# Altium PCB msp430f.PcbDoc (part 1 of 2)
Units mil, origin at the board's own origin, x right, y up, seen from the top; angles counter-clockwise.
Board outline 1930 x 4050 mil, 2 copper layers (Top Layer, Bottom Layer); 52 components, 80 nets, 292 pads, 95 vias.
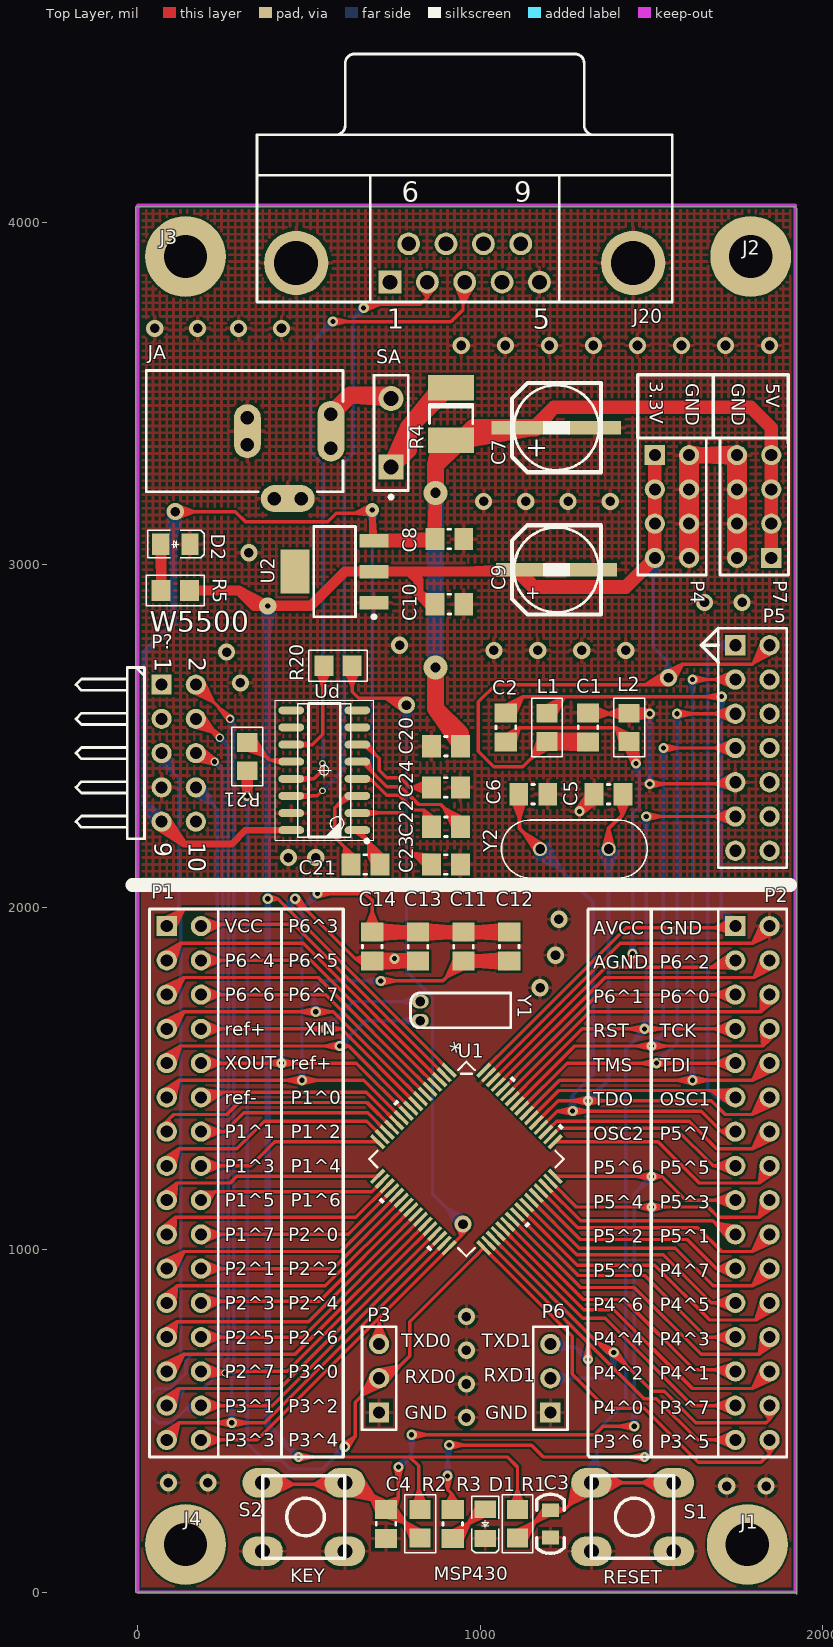
[diagram p0: Top Layer view]
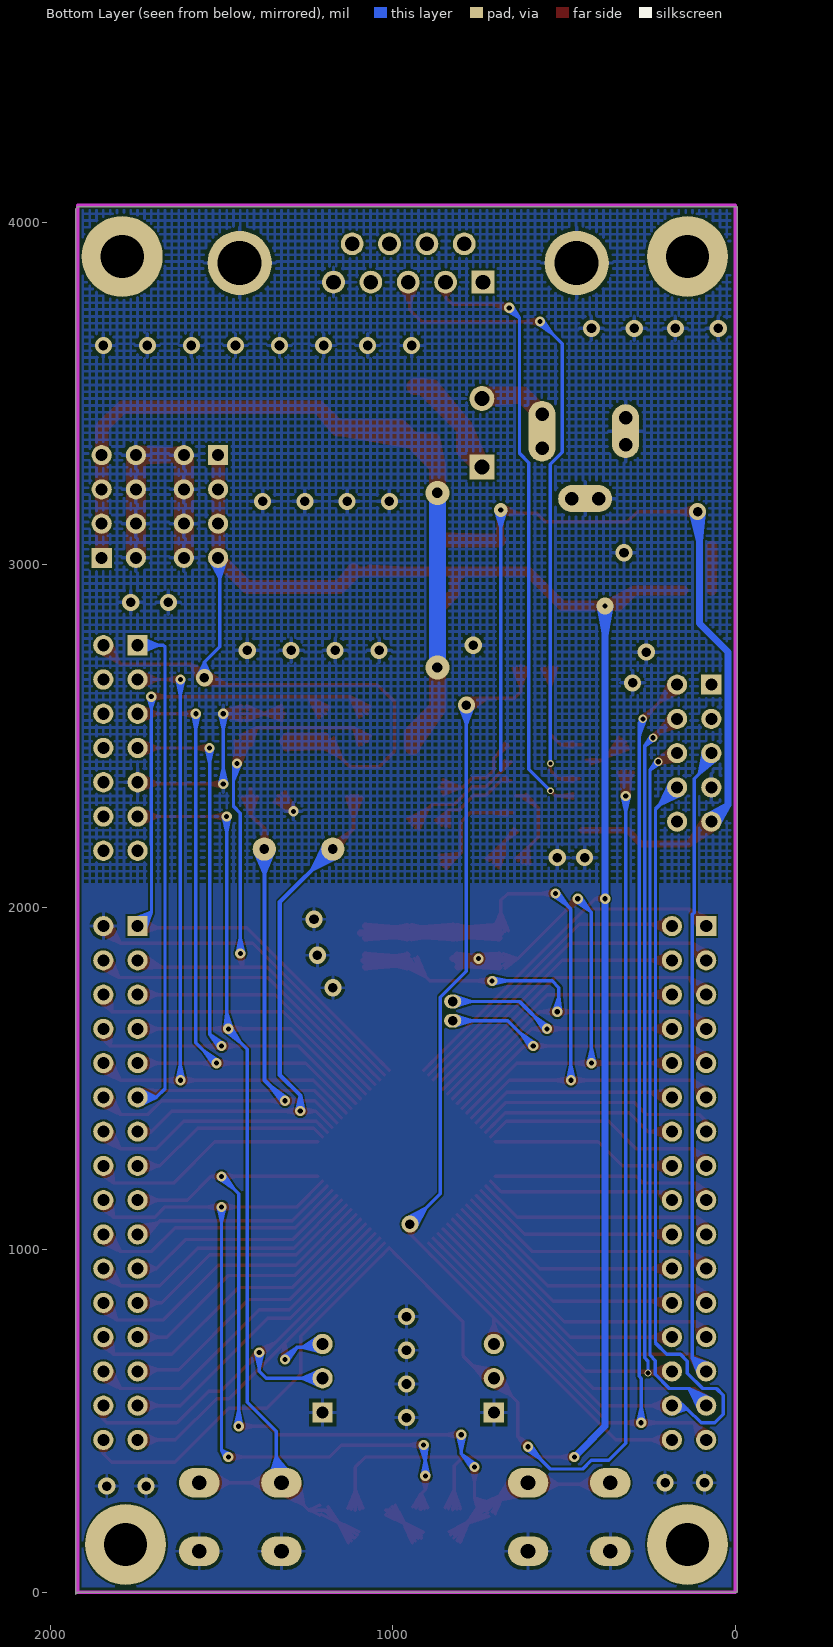
[diagram p1: Bottom Layer view, seen from below]

## Layer stack, top to bottom
Top Layer: signal copper 1.4
Dielectric: dielectric 12.6, FR-4, Dk 4.8
Bottom Layer: signal copper 1.4

## Board outline
-5,4045 -5,0 1920,0 1925,-5 1925,3215 1925,4040 1920,4045 -5,4045

## Design rules (kind name [scope] priority, off if disabled: settings)
Clearance [All] p1: gap=6
FabricationTestPointUsage TestPointUsage [All] p1: valid=0 allowmultiple=FALSE
FabricationTestpoint Testpoint [All] p1: side=3 testpointundercomponent=TRUE minsize=40 maxsize=100 preferedsize=60 minholesize=0 maxholesize=40 preferedholesize=32 testpointgrid=1 allowsidetop=TRUE allowsidebottom=TRUE usegrid=TRUE gridtolerance=0.01
HoleSize [All] p1: absolutevalues=TRUE maxlimit=1000 minlimit=1 maxpercent=80.000 minpercent=20.000
PolygonConnect [All] p1: connectstyle=Relief reliefconductorwidth=10 reliefentries=4 polygonreliefangle="90 Angle" airgapwidth=10
RoutingVias [All] p1: holewidth=28 width=50 viastyle="Through Hole" minholewidth=2 minwidth=5 maxholewidth=280 maxwidth=500
SolderMaskExpansion [All] p1: expansion=4
Width [All] p1: maxlimit=100 minlimit=10 preferedwidth=10
25 further rules are at their usual default settings.

## Components (designator, comment, footprint, x,y, rotation, side; value= is the part's Value field where it differs from the comment)
C1 "" CAP_SMD_0805_2012_M 1315,2525 r90 top
C2 "" CAP_SMD_0805_2012_M 1075,2525 r270 top
C3 "" c0805 1205,200 r90 top
C4 "" CAP_SMD_0805_2012_M 725,200 r90 top
C5 "22P" CAP_SMD_0805_2012_M 1375,2330 r0 top
C6 "22P" CAP_SMD_0805_2012_M 1155,2330 r180 top
C7 "CAP" AEC_SMD_6.3*5.3_6.3*7.7_M 1115,3400 r0 top
C8 "" CAP_SMD_0805_2012_M 910,3075 r180 top
C9 "CAP" EC6.3X6.3 1115,2985 r0 top
C10 "" CAP_SMD_0805_2012_M 910,2885 r180 top
C11 "" CAP_SMD_0805_2012_M 951.67,1885 r270 top
C12 "" CAP_SMD_0805_2012_M 1085,1885 r270 top
C13 "" CAP_SMD_0805_2012_M 818.33,1885 r270 top
C14 "" CAP_SMD_0805_2012_M 685,1885 r270 top
C20 "0.1uF" CAP_SMD_0805_2012_M 900,2470 r0 top
C21 "0.1uF" CAP_SMD_0805_2012_M 665,2125 r180 top
C22 "0.1uF" CAP_SMD_0805_2012_M 900,2235 r0 top
C23 "0.1uF" CAP_SMD_0805_2012_M 900,2125 r180 top
C24 "0.1uF" CAP_SMD_0805_2012_M 900,2350 r180 top
D1 "LED0" LED_SMD_0805_2012_M 1015,200 r90 top
D2 "LED0" LED_SMD_0805_2012_M 110,3060 r180 top
J1 "Socket" Screw_3x6 1780,140 r0 top
J2 "Socket" Screw_3x6 1790,3900 r0 top
J3 "Socket" Screw_3x6 140,3900 r0 top
J4 "Socket" Screw_3x6 140,140 r0 top
J20 "DB9_Female" DSUB1.385-2H9 955,4255 r0 top
JA "PWR2.5" KLD-0202 25,3390 r0 top
L1 "Inductor" RES_SMD_0805_2012_M 1195,2525 r270 top
L2 "Inductor" RES_SMD_0805_2012_M 1435,2525 r90 top
P1 "Header 16X2" HDR2X16 85,1945 r270 top
P2 "Header 16X2" HDR2X16 1745,1945 r270 top
P3 "Header 3" HDR1X3 705,525 r90 top
P4 "Header 4X2" HDR2X4 1510,3320 r270 top
P5 "Header 7X2" HDR2X7 1745,2765 r270 top
P6 "Header 3" HDR1X3 1205,525 r90 top
P7 "Header 4X2" HDR2X4 1850,3020 r90 top
P? "Header 5X2H" HDR2X5H 70,2650 r270 top
R1 "Res2" RES_SMD_0805_2012_M 1109,200 r90 top
R2 "Res2" RES_SMD_0805_2012_M 825,200 r90 top
R3 "Res2" CAP_SMD_0805_2012_M 920,200 r270 top
R4 "500mA FUSE" 1812 915,3440 r270 top
R5 "Res2" RES_SMD_0805_2012_M 110,2925 r0 top
R20 "100R" RES_SMD_0805_2012_M 585,2705 r0 top
R21 "100R" RES_SMD_0805_2012_M 320,2440 r270 top
S1 "SW-PB" SW01 1265,360 r0 top
S2 "SW-PB" SW01 305,360 r0 top
SA "SW-PB" SPST-2 740,3385 r90 top
U1 "MSP430F14 7/8/9" TQFP-64 960,1265 r315 top
U2 "AMS1117" SOT230P700X180-4N 575,2980 r180 top
Ud "SP3232" SOIC-16N 545,2400 r180 top
Y1 "" XTAL32 825,1725 r0 top
Y2 "12M" XTAL_DIP_HC49US2_N 1375,2170 r180 top

## Footprints (in the part's own frame and the unit in brackets; to place one, negate y for a bottom-side part, rotate by r counter-clockwise, add the part's x,y. Pads: shape width x height; smd on the part's side, far side on the other; paste and mask are expansions set on the pad)
1812 [mm] "Chip Capacitor; Body 4.5 x 3.2 mm (LxW typ)"
  rect 1.9x3.4 smd: 1(-1.95,0) 2(1.95,0)
  silkscreen extent -0.7,-1.6 0.7,1.6
AEC_SMD_6.3*5.3_6.3*7.7_M [mm]
  rect 3.9x1 smd: 1(-0.127,0) 2(5.588,0)
  silkscreen extent -0.56,-3.31 6.04,3.31
c0805 [mil]
  rect 40x50 smd: 1(-40,0) 2(40,0)
  silkscreen extent -86,-40 86,40
CAP_SMD_0805_2012_M [mm] "Chip Capacitor, 2-Leads, Body 2.15x1.35mm, IPC Low Density"
  rect 1.4x1.65 smd: 1(-1.075,0) 2(1.075,0)
  silkscreen extent -0.1,-0.72 0.1,0.72, body extent -1.15,-0.75 1.15,0.75, height 0.9
DSUB1.385-2H9 [mm] "Connector; D Subminiature; 9 Position; Right Angle; Pitch 1.385 mm"
  rect 1.69x1.69 hole 1.09: 1(-5.54,-10.92)
  round 1.69 hole 1.09: 2(-2.77,-10.92) 3(0,-10.92) 4(2.77,-10.92) 5(5.54,-10.92) 6(-4.155,-8.08) 7(-1.385,-8.08) 8(1.385,-8.08) 9(4.155,-8.08)
  round 4.76 hole 3.26: 10(-12.495,-9.5) 11(12.495,-9.5)
  silkscreen extent -15.4,-12.4 15.4,6
EC6.3X6.3 [mm]
  rect 3.5x1 smd: 1(0,0) 2(5.475,0)
  silkscreen extent -0.56,-3.31 6.04,3.31
HDR1X3 [mm] "Connector; Header; 3 Position"
  rect 1.5x1.5 hole 0.9: 1(0,0)
  round 1.5 hole 0.9: 2(2.54,0) 3(5.08,0)
  silkscreen extent -1.27,-1.27 6.35,1.27
HDR2X4 [mm] "Connector; Header; 4x2 Position"
  rect 1.5x1.5 hole 0.9: 1(0,0)
  round 1.5 hole 0.9: 2(0,2.54) 3(2.54,0) 4(2.54,2.54) 5(5.08,0) 6(5.08,2.54) 7(7.62,0) 8(7.62,2.54)
  silkscreen extent -1.27,-1.27 8.89,3.81
HDR2X5H [mm] "Connector; Header; 5x2 Position; Right Angle"
  rect 1.5x1.5 hole 0.9: 1(0,0)
  round 1.5 hole 0.9: 2(0,2.54) 3(2.54,0) 4(2.54,2.54) 5(5.08,0) 6(5.08,2.54) 7(7.62,0) 8(7.62,2.54) 9(10.16,0) 10(10.16,2.54)
  silkscreen extent -1.27,-6.35 11.43,-1.27
HDR2X7 [mm] "Connector; Header; 7x2 Position"
  rect 1.5x1.5 hole 0.9: 1(0,0)
  round 1.5 hole 0.9: 2(0,2.54) 3(2.54,0) 4(2.54,2.54) 5(5.08,0) 6(5.08,2.54) 7(7.62,0) 8(7.62,2.54) 9(10.16,0) 10(10.16,2.54) 11(12.7,0) 12(12.7,2.54) 13(15.24,0) 14(15.24,2.54)
  silkscreen extent -1.27,-1.27 16.51,3.81
HDR2X16 [mm] "Connector; Header; 16x2 Position"
  rect 1.5x1.5 hole 0.9: 1(0,0)
  round 1.5 hole 0.9: 2(0,2.54) 3(2.54,0) 4(2.54,2.54) 5(5.08,0) 6(5.08,2.54) 7(7.62,0) 8(7.62,2.54) 9(10.16,0) 10(10.16,2.54) 11(12.7,0) 12(12.7,2.54) 13(15.24,0) 14(15.24,2.54) 15(17.78,0) 16(17.78,2.54) 17(20.32,0) 18(20.32,2.54) 19(22.86,0) 20(22.86,2.54) 21(25.4,0) 22(25.4,2.54) 23(27.94,0) 24(27.94,2.54) 25(30.48,0) 26(30.48,2.54) 27(33.02,0) 28(33.02,2.54) 29(35.56,0) 30(35.56,2.54) 31(38.1,0) 32(38.1,2.54)
  silkscreen extent -1.27,-1.27 39.37,3.81
KLD-0202 [mm] "DC Power Jack, 2.5mm, KLD Series, PCB Mount"
  oval 2x4.5 all layers, no hole: 1(13.7,0)
  round 1.5 hole 1: 1A(13.7,-1.25) 1B(13.7,1.25) 2A(7.5,-1) 2B(7.5,1) 3A(9.5,-5) 3B(11.5,-5)
  oval 2x4 all layers, no hole: 2(7.5,0)
  oval 4x2 all layers, no hole: 3(10.5,-5)
  silkscreen extent 0,-4.5 14.6,4.5
LED_SMD_0805_2012_M [mm] "LED 2-Leads, Body 2.00x1.35mm, IPC Low Density"
  rect 1.28x1.57 smd: 1(1.085,0) 2(-1.085,0)
  silkscreen extent -2.16,-1.02 2.03,1.02, body extent -1.1,-0.72 1.1,0.72, height 0.8
RES_SMD_0805_2012_M [mm] "Chip Resistor, 2-Leads, Body 2.10x1.37mm, IPC Low Density"
  rect 1.4x1.55 smd: 1(-1.05,0) 2(1.05,0)
  silkscreen extent -2.16,-1.14 2.16,1.14, body extent -1.1,-0.73 1.1,0.73, height 0.8
Screw_3x6 [mm]
  round 6 hole 3.2: 1(0,0)
SOIC-16N [mm]
  oval 1.9x0.6 smd: 1(-2.45,4.445) 2(-2.45,3.175) 3(-2.45,1.905) 4(-2.45,0.635) 5(-2.45,-0.635) 6(-2.45,-1.905) 7(-2.45,-3.175) 8(-2.45,-4.445) 9(2.45,-4.445) 10(2.45,-3.175) 11(2.45,-1.905) 12(2.45,-0.635) 13(2.45,0.635) 14(2.45,1.905) 15(2.45,3.175) 16(2.45,4.445)
  silkscreen extent -3.65,-5.2 3.65,5.37
SOT230P700X180-4N [mm] "SOT223, 4-Leads, Body 6.50x7.00mm (avg), Pitch 2.30mm, IPC Medium Density"
  rect 2.15x1 smd: 1(-2.925,2.3) 2(-2.925,0) 3(-2.925,-2.3)
  rect 2.15x3.25 smd: 4(2.925,0)
  silkscreen extent -3.05,-3.35 1.55,3.47, body extent -1.85,-3.35 1.85,3.35, height 1.8
SPST-2 [mm] "Switch; 2 Leads"
  rect 1.85x1.85 hole 1.1: 1(-2.54,0)
  round 1.85 hole 1.1: 2(2.54,0)
  silkscreen extent -4.89,-1.27 4.28,1.27
SW01 [mm]
  oval 2.999x2.2 hole 1.1: 1(1.524,-1.016) 1(7.62,-1.016) 2(1.524,-6.096) 2(7.62,-6.096)
  silkscreen extent 1.52,-6.6 7.62,-0.51
TQFP-64 [mil]
  rect 53.5x11 smd: 1(-219.25,147.64) 2(-219.25,127.95) 3(-219.25,108.27) 4(-219.25,88.58) 5(-219.25,68.9) 6(-219.25,49.21) 7(-219.25,29.53) 8(-219.25,9.84) 9(-219.25,-9.84) 10(-219.25,-29.53) 11(-219.25,-49.21) 12(-219.25,-68.9) 13(-219.25,-88.58) 14(-219.25,-108.27) 15(-219.25,-127.95) 16(-219.25,-147.64) 33(219.25,-147.64) 34(219.25,-127.95) 35(219.25,-108.27) 36(219.25,-88.58) 37(219.25,-68.9) 38(219.25,-49.21) 39(219.25,-29.53) 40(219.25,-9.84) 41(219.25,9.84) 42(219.25,29.53) 43(219.25,49.21) 44(219.25,68.9) 45(219.25,88.58) 46(219.25,108.27) 47(219.25,127.95) 48(219.25,147.64)
  rect 11x53.5 smd: 17(-147.64,-219.25) 18(-127.95,-219.25) 19(-108.27,-219.25) 20(-88.58,-219.25) 21(-68.9,-219.25) 22(-49.21,-219.25) 23(-29.53,-219.25) 24(-9.84,-219.25) 25(9.84,-219.25) 26(29.53,-219.25) 27(49.21,-219.25) 28(68.9,-219.25) 29(88.58,-219.25) 30(108.27,-219.25) 31(127.95,-219.25) 32(147.64,-219.25) 49(147.64,219.25) 50(127.95,219.25) 51(108.27,219.25) 52(88.58,219.25) 53(68.9,219.25) 54(49.21,219.25) 55(29.53,219.25) 56(9.84,219.25) 57(-9.84,219.25) 58(-29.53,219.25) 59(-49.21,219.25) 60(-68.9,219.25) 61(-88.58,219.25) 62(-108.27,219.25) 63(-127.95,219.25) 64(-147.64,219.25)
  silkscreen extent -266,-266 266,266, body extent 0,0 10,10, height 10
XTAL32 [mil]
  oval 50x40 hole 28: 1(0,0) 2(0,-56)
  silkscreen extent -28,-77 264,25
XTAL_DIP_HC49US2_N [mil]
  round 42 / inner round 68 / far side round 68 hole 28: 1(0,0) 2(200,0)
  silkscreen extent -113,-85 313,85

## Part data
C1 C2 C3 C4 C8 C10 C11 C12 C13 C14: library part Cap, "Capacitor"
C5 C6: library part CAP
C20 C21 C22 C23 C24: library part C, "C Capacity"
D1 D2: "Typical INFRARED GaAs LED"
J20: library part DB9, "J Receptacle Assembly, 9 Position, Right Angle"
JA: "Low Voltage Power Supply Connector"
P1 P2: "Header, 16-Pin, Dual row"
P3 P6: "Header, 3-Pin"
P4 P7: "Header, 4-Pin, Dual row"
P5: "Header, 7-Pin, Dual row"
P?: "Header, 5-Pin, Dual row, Right Angle"
R1 R2 R3 R5: "Resistor"
R4: library part Res2, "Resistor"
R20 R21: library part R, "R Resistor"
S1 S2 SA: "Switch"
Ud: library part MAX3232, "U +3.3V Powered RS-232 Driver/Receiver"
Y1: library part XTAL, "Crystal Oscillator"
Y2: library part CRYSTAL

## Via types
v1: diameter 50, hole 28, Top Layer to Bottom Layer, 43 vias
v2: diameter 30, hole 15, Top Layer to Bottom Layer, 42 vias
v3: diameter 25, hole 15, Top Layer to Bottom Layer, 3 vias
v4: diameter 70, hole 30, Top Layer to Bottom Layer, 2 vias
v5: diameter 20, hole 12, Top Layer to Bottom Layer, 2 vias
v6: diameter 40, hole 15, Top Layer to Bottom Layer, 1 vias
v7: diameter 20, hole 15, Top Layer to Bottom Layer, 1 vias
v8: diameter 50, hole 15, Top Layer to Bottom Layer, 1 vias

## Nets (pads, with @x,y where several pads share a name; then routed paths per layer and width w, separated by ;. In a path a pad name is that pad's centre, name@x,y a point inside that pad or via, vN(x,y) a via of type N, cw(c..) or ccw(c..) an arc to the next point about the centre after c; other vN are vias at no path point)
AGND: C2.2 L2.1 P2.3 U1.62 | length 4341
  Top Layer w10: U1.62@1038.64,1496.76 1366.89,1825 1725,1825 P2.3@1745,1845 1674.25,1825 ; U1.62@1053.5,1511.62 1078.6,1536.72 ; C2.2@1065.91,2500.36 1114.37,2524.37 ; C2.2@1071.23,2491.75 1114.37,2524.37 ; C2.2@1075,2485 1114.37,2524.37 ; C2.2@1079.92,2482.68 1114.37,2524.37 ; C2.2@1090.47,2475.86 1114.37,2524.37 ; C2.2@1099.93,2472.25 1114.37,2524.37 ; L2.1@1412.3,2472.76 1396.69,2524.37 ; L2.1@1417.52,2474.1 v2@1455,2420.58 ; L2.1@1421.67,2476.59 1396.69,2524.37 ; L2.1@1426.2,2479.23 v2@1455,2420.58 ; L2.1@1432.05,2483.66 1396.69,2524.37 ; L2.1@1434.8,2486.26 1396.69,2524.37 ; v2@1435,1865 1440,1825 ; L2.1@1435,2485 L2.1@1455,2465 ; L2.1@1437.95,2483.66 v2@1455,2420.58 ; L2.1@1440.51,2492.94 1396.69,2524.37 ; v2@1445.01,2420.41 L2.1@1451.83,2464.93 ; v2@1445.06,2421.11 L2.1@1455,2465 ; v2@1445.11,2418.5 L2.1@1443.27,2463.99 ; v2@1445.19,2421.92 L2.1@1458.69,2464.9 ; v2@1445.58,2416.63 L2.1@1434.66,2462.01 ; L2.1@1445.61,2501.69 1396.69,2524.37 ; v2@1446.23,2415.2 L2.1@1427.6,2459.71 ; L2.1@1450.34,2485.76 v2@1455,2420.58 ; v2@1454.69,1862.54 1440,1825 ; L2.1@1460.42,2485.7 v2@1455,2420.58 ; v2@1462.6,2426.5 L2.1@1427.6,2459.71 ; v2@1463.48,2425.3 L2.1@1434.66,2462.01 ; v2@1464.32,2423.62 L2.1@1443.27,2463.99 ; v2@1464.84,2421.81 L2.1@1451.83,2464.93 ; v2@1464.94,2421.11 L2.1@1455,2465 ; v2@1465,2420.29 L2.1@1458.69,2464.9 ; P2.3@1734.48,1867.16 1674.25,1825 ; P2.3@1739.69,1858.52 1674.25,1825 ; P2.3@1747.55,1830.7 1674.25,1825 ; P2.3@1747.64,1820.62 1674.25,1825 ; 1114.37,2524.37 1396.69,2524.37 ; L2.1@1427.6,2459.71 v2(1455,2420) ; L2.1@1434.66,2462.01 v2(1455,2420) ; 1440,1825 v2(1445,1865) 1440,1860 1440,1825 ; L2.1@1443.27,2463.99 v2(1455,2420) ; L2.1@1451.83,2464.93 v2(1455,2420) ; v2(1455,2420) L2.1@1458.69,2464.9 ; v2(1455,2420) L2.1@1455,2465
  Bottom Layer w10: v2@1435.06,1866.11 1445,1910 v2@1454.94,1866.11 ; v2(1445,1865) 1445,2275 1465,2295 1465,2410 v2(1455,2420) 1465,2369.88 ; v2@1445.43,2417.09 1465,2369.88 ; v2@1464.95,2420.99 1465,2369.88
AVCC: C2.1 L1.1 P2.1 U1.64 | length 3757
  Top Layer w10: U1.64@1010.81,1524.6 1426.21,1940 P2.1@1755,1940 ; U1.64@1025.66,1539.45 1050.77,1564.56 ; C2.1@1066.44,2585.41 1125,2615 ; C2.1@1071.66,2576.78 1125,2615 ; C2.1@1075,2565 1125,2615 ; C2.1@1079.92,2567.32 1125,2615 ; C2.1@1089.83,2559.61 1125,2615 ; C2.1@1098.73,2554.87 1125,2615 ; L1.1@1184.84,2584.69 1245.97,2614.51 ; L1.1@1189.91,2575.99 1245.97,2614.51 ; L1.1@1195.73,2564.27 1246.46,2615 ; L1.1@1197.95,2566.34 1245.97,2614.51 ; L1.1@1207.63,2558.33 1245.97,2614.51 ; L1.1@1216.35,2553.28 1245.97,2614.51 ; v2@1703.89,2605.06 1660,2615 v2@1703.89,2624.94 ; v2(1705,2615) 1125,2615 ; P2.1@1738,1968.51 1685.21,1940 ; P2.1@1742,1920.66 1685.21,1940 ; P2.1@1742.05,1959.22 1685.21,1940 ; P2.1@1744.45,1930.48 1685.21,1940 ; P2.1@1745,1945 1685.21,1940
  Bottom Layer w10: v2@1695.12,2613.47 1705,2582.31 ; v2@1714.88,2613.47 1705,2582.31 ; P2.1@1724.35,1931.77 1704.47,1985.53 ; P2.1@1733.51,1936.11 1704.47,1985.53 ; P2.1@1745,1945 1704.47,1985.53 ; P2.1@1753.89,1956.49 1704.47,1985.53 ; P2.1@1758.23,1965.65 1704.47,1985.53 ; 1704.47,1985.53 1704.47,2181.79 1705,2182.31 1705,2247.69 1704.47,2248.21 1704.47,2281.79 1705,2282.31 1705,2347.69 1704.47,2348.21 1704.47,2381.79 1705,2382.31 1705,2447.69 1704.47,2448.21 1704.47,2481.79 1705,2482.31 1705,2547.69 1704.47,2548.21 1704.47,2581.79 1705,2582.31 ; 1705,2582.31 v2(1705,2615) 1698.94,2608.94 1705,2608.94 1705,2582.31
GND: C1.2 C3.1 C4.1 C5.1 C6.1 C7.2 C8.1 C9.2 C10.1 C20.1 C23.1 C24.1 D1.2 D2.2 J20.5 J20.10 J20.11 JA.2 JA.2A JA.2B JA.3 JA.3A JA.3B L2.2 P2.2 P3.1 P4.2 P4.4 P4.6 P4.8 P5.9 P6.1 P7.2 P7.4 P7.6 P7.8 P?.7 S1.2 S2.2 U1.63 U2.1 Ud.15 | length 14700.9
  Top Layer w10: U1.63@1024.73,1510.68 1409.05,1895 1795,1895 ; U1.63@1039.58,1525.54 1064.69,1550.64 ; v2@1281.23,2284.8 1307.69,2322.72 v2@1299.6,2277.2 ; v2@1282.1,2286.14 1315.13,2320.49 v2@1299,2275.65 ; v2@1283.45,2287.56 1324.83,2316.79 v2@1297.9,2273.88 ; v2@1283.65,2287.73 1326.21,2316.21 v2@1297.73,2273.65 ; v2@1285.15,2288.74 1329.59,2307.67 v2@1296.55,2272.44 ; v2@1286.67,2289.43 1332.05,2300.17 v2@1295.27,2271.5 ; C5.1@1313.75,2337.35 v2(1290,2280) ; C1.2@1315,2565 v2(1495,2565) ; C1.2@1319.92,2567.32 1377.54,2565 ; C1.2@1320.78,2554.79 1377.54,2565 ; C1.2@1321.79,2579.74 1377.54,2565 ; C5.1@1322.73,2332.75 v2(1290,2280) ; C1.2@1323.44,2545.04 1377.54,2565 ; C1.2@1325.22,2589.25 1377.54,2565 ; C5.1@1332.68,2325.08 v2(1290,2280) ; C5.1@1335,2325 v2(1290,2280) ; C5.1@1340.88,2315.57 v2(1290,2280) ; C5.1@1345.97,2306.85 v2(1290,2280) ; L2.2@1427.12,2588.35 1374.47,2565 ; L2.2@1428.14,2544.12 1374.47,2565 ; L2.2@1430.39,2578.79 1374.47,2565 ; L2.2@1430.97,2553.83 1374.47,2565 ; L2.2@1432.05,2566.34 1374.47,2565 ; L2.2@1437.95,2566.34 v2(1495,2565) ; L2.2@1439.04,2553.83 v2(1495,2565) ; L2.2@1439.63,2578.79 v2(1495,2565) ; L2.2@1441.89,2544.13 v2(1495,2565) ; L2.2@1442.93,2588.34 v2(1495,2565) ; v2@1489.95,2556.37 1452.62,2584 v2@1498.08,2574.51 ; v2@1490.35,2573.86 1452.08,2548.13 v2@1497.63,2555.35 ; v2@1491.53,2555.62 1450.89,2575.98 v2@1496.33,2574.91 ; v2@1491.97,2574.53 1450.58,2556.13 v2@1495.86,2555.04 ; v2@1493.66,2555.09 1450.01,2566.06 v2@1494.12,2574.96 ; v2@1493.89,2555.06 1450,2565 v2@1493.89,2574.94 ; v2(1495,2360) P5.9@1745,2360 ; v2@1496.11,2350.06 1540,2360 v2@1496.11,2369.94 ; P5.9@1738.01,2388.51 1685.15,2360 ; P5.9@1742.01,2340.66 1685.15,2360 ; P5.9@1742.05,2379.22 1685.15,2360 ; P5.9@1744.45,2350.48 1685.15,2360 ; P5.9@1745,2365 1685.15,2360 ; P2.2@1824.91,1959.07 1795,1895 ; P2.2@1833.73,1954.16 1795,1895 ; P2.2@1845,1945 1795,1895 ; P2.2@1854.16,1933.73 1795,1895 ; P2.2@1859.07,1924.91 1795,1895
  Top Layer w25: P4.6@1593.04,3118.47 P4.8@1610,3025 ; P4.6@1593.03,3118.55 P4.8@1610,3020 ; P4.4@1593.03,3218.55 P4.6@1610,3120 ; P4.2@1593.03,3318.55 P4.4@1610,3220 ; P4.2@1593.03,3321.45 P4.4@1593.03,3221.45 ; P4.6@1593.53,3115.69 P4.8@1626.97,3021.45 ; P4.4@1593.53,3215.69 P4.6@1626.97,3121.45 ; P4.2@1593.53,3315.69 P4.4@1626.97,3221.45 ; P4.8@1600,3015 P4.8@1616.38,3031.38 ; P4.2@1611.39,3303.03 1714.53,3320 ; P4.2@1611.39,3336.97 1714.53,3320 ; P4.6@1626.47,3115.69 P4.8@1593.03,3021.45 ; P4.4@1626.47,3215.69 P4.6@1593.03,3121.45 ; P4.2@1626.47,3315.69 P4.4@1593.03,3221.45 ; P4.6@1626.96,3118.47 P4.8@1610,3025 ; P4.6@1626.97,3118.55 P4.8@1610,3020 ; P4.4@1626.97,3218.55 P4.6@1610,3120 ; P4.2@1626.97,3318.55 P4.4@1610,3220 ; P4.2@1626.97,3321.45 P4.4@1626.97,3221.45 ; P7.2@1733.03,3018.55 P7.4@1733.03,3118.55 ; P7.2@1733.03,3021.45 P7.4@1750,3120 ; P7.4@1733.03,3121.45 P7.6@1750,3220 ; P7.6@1733.03,3221.45 P7.8@1750,3320 ; P7.2@1733.53,3024.31 P7.4@1766.97,3118.55 ; P7.4@1733.53,3124.31 P7.6@1766.97,3218.55 ; P7.6@1733.53,3224.31 P7.8@1766.97,3318.55 ; P7.8@1745,3320 P4.2@1610,3320 ; P7.8@1746.8,3303.28 1644.96,3331.45 ; P7.8@1746.8,3336.72 1644.96,3308.55 ; P7.8@1748.61,3303.03 1645.47,3320 ; P7.8@1748.61,3336.97 1645.47,3320 ; P7.8@1750.47,3302.98 1644.96,3308.55 ; P7.8@1750.47,3337.02 1644.96,3331.45 ; P7.2@1766.47,3024.31 P7.4@1733.03,3118.55 ; P7.4@1766.47,3124.31 P7.6@1733.03,3218.55 ; P7.6@1766.47,3224.31 P7.8@1733.03,3318.55 ; P7.2@1766.97,3018.55 P7.4@1766.97,3118.55 ; P7.2@1766.97,3021.45 P7.4@1750,3120 ; P7.4@1766.97,3121.45 P7.6@1750,3220 ; P7.6@1766.97,3221.45 P7.8@1750,3320 ; P4.8@1593.03,3021.45 P4.6@1593.03,3121.45 ; P4.8@1593.03,3021.45 P4.6@1610,3120 ; P4.6@1593.03,3121.45 P4.4@1593.03,3221.45 ; P4.6@1593.03,3121.45 P4.4@1610,3220 ; P4.4@1593.03,3221.45 P4.2@1610,3320 ; P4.8@1610,3020 P4.6@1610,3120 ; P4.8@1610,3025 P4.6@1610,3120 ; P4.6@1610,3120 P4.8@1626.97,3021.45 ; P4.6@1610,3120 P4.4@1610,3220 ; P4.4@1610,3220 P4.6@1626.97,3121.45 ; P4.4@1610,3220 P4.2@1610,3320 ; P4.2@1610,3320 P4.4@1626.97,3221.45 ; P4.8@1626.97,3021.45 P4.6@1626.97,3121.45 ; P4.6@1626.97,3121.45 P4.4@1626.97,3221.45 ; 1644.96,3308.55 P7.8@1750,3320 ; 1644.96,3331.45 P7.8@1750,3320 ; 1645.47,3320 P7.8@1750,3320 ; 1714.53,3320 P7.8@1750,3320 ; 1714.53,3320 1745.91,3336.53 1714.53,3320 ; 1714.53,3320 1745.91,3303.47 1714.53,3320 ; 1714.53,3320 P7.8@1750,3320 ; P7.4@1733.03,3118.55 P7.2@1750,3020 ; P7.4@1733.03,3118.55 P7.6@1733.03,3218.55 ; P7.6@1733.03,3218.55 P7.8@1733.03,3318.55 ; P7.6@1733.03,3218.55 P7.4@1750,3120 ; P7.8@1733.03,3318.55 P7.6@1750,3220 ; P7.2@1750,3020 P7.4@1766.97,3118.55 ; P7.2@1750,3020 P7.4@1750,3120 ; P7.4@1750,3120 P7.6@1766.97,3218.55 ; P7.4@1750,3120 P7.6@1750,3220 ; P7.6@1750,3220 P7.8@1766.97,3318.55 ; P7.6@1750,3220 P7.8@1750,3320 ; P7.4@1766.97,3118.55 P7.6@1766.97,3218.55 ; P7.6@1766.97,3218.55 P7.8@1766.97,3318.55
  Bottom Layer w10: v2@1485.06,2361.11 1495,2405 v2@1504.94,2361.11 ; v2@1485.06,2563.89 1495,2520 v2@1504.94,2563.89 ; v2(1495,2360) v2(1495,2565)
  Bottom Layer w25: JA.2A@303.35,3352.47 JA.2B@320.28,3429.37 ; JA.2A@304.14,3356.07 JA.2B@337.19,3427.41 ; JA.2A@336.41,3356.07 JA.2B@303.36,3427.41 ; JA.2A@337.2,3352.47 JA.2B@320.28,3429.37 ; JA.2A@303.35,3348.81 JA.2B@303.65,3425.69 ; JA.2A@303.35,3348.79 JA.2B@303.36,3427.41 ; JA.2A@303.35,3348.81 JA.2B@303.65,3425.69 ; JA.2B@303.36,3427.41 JA.2A@320.28,3350.63 ; JA.2B@303.36,3427.41 JA.2A@320.28,3355.28 ; JA.2A@303.65,3354.31 JA.2@320.28,3390 ; JA.2A@303.65,3354.31 JA.2@320.28,3390 ; JA.2A@303.65,3354.31 JA.2@320.28,3390 ; JA.2A@303.65,3354.31 JA.2@320.28,3390 ; JA.2A@303.65,3354.31 JA.2@320.28,3390 ; JA.2A@303.65,3354.31 JA.2@320.28,3390 ; JA.2B@303.65,3425.69 JA.2A@320.28,3350.63 ; JA.2B@303.65,3425.69 336.39,3356.13 JA.2B@303.65,3425.69 ; JA.2B@303.65,3425.69 JA.2A@320.28,3350.63 ; JA.2B@303.65,3425.69 JA.2@320.28,3390 ; JA.2B@303.65,3425.69 JA.2@320.28,3390 ; JA.2A@320.28,3350.63 JA.2@320.28,3390 ; JA.2A@320.28,3350.63 JA.2@320.28,3390 ; JA.2A@320.28,3350.63 JA.2B@336.9,3425.69 ; JA.2A@320.28,3350.63 JA.2B@337.19,3427.41 ; JA.2A@320.28,3350.63 JA.2@320.28,3390 ; JA.2A@320.28,3350.63 JA.2@320.28,3390 ; JA.2A@320.28,3350.63 JA.2B@336.9,3425.69 ; JA.2A@320.28,3350.63 JA.2@320.28,3390 ; JA.2A@320.28,3355.28 JA.2B@337.19,3427.41 ; JA.2A@320.28,3355.28 JA.2@320.28,3390 ; JA.2@320.28,3390 JA.2A@336.9,3354.31 ; JA.2@320.28,3390 JA.2A@336.9,3354.31 ; JA.2@320.28,3390 JA.2A@336.9,3354.31 ; JA.2@320.28,3390 JA.2A@336.9,3354.31 ; JA.2@320.28,3390 JA.2A@336.9,3354.31 ; JA.2@320.28,3390 JA.2A@336.9,3354.31 ; JA.2@320.28,3390 JA.2B@336.9,3425.69 ; JA.2@320.28,3390 JA.2B@336.9,3425.69 ; JA.2@320.28,3390 JA.2B@320.28,3429.37 ; JA.2B@336.9,3425.69 JA.2A@337.21,3348.81 ; JA.2B@336.9,3425.69 304.16,3356.13 JA.2B@336.9,3425.69 ; JA.2B@336.9,3425.69 JA.2A@337.21,3348.81 ; JA.2A@337.2,3348.79 JA.2B@337.19,3427.41
  other v1: 1720,310 1835,310 90,320 205,320 960,510 960,608.33 960,706.67 960,805 1175,1765 1220,1860 1230,1965 440,2145 520,2145 300,2655 260,2745 1040,2750 1168.33,2750 1296.67,2750 1425,2750 765,2765 1655,2890 1765,2890 325,3035 1010,3185 1133.33,3185 1256.67,3185 1380,3185 945,3640 1073.57,3640 1202.14,3640 1330.71,3640 1459.29,3640 1587.86,3640 1716.43,3640 1845,3640 50,3690 175,3690 295,3690 420,3690
KEY: C4.2 P2.17 R2.1 S2.1 U1.48 | length 7235.1
  Top Layer w10: S2.1@350,315 650,315 C4.2@725,240 ; S2.1@380.63,311.69 454.14,315 ; S2.1@380.73,320 454.14,315 ; S2.1@381.77,301.72 454.14,315 ; S2.1@381.76,328.24 454.14,315 ; S2.1@384.27,291.92 454.14,315 ; S2.1@384.23,337.97 454.14,315 ; S2.1@388.05,347.34 454.14,315 ; S2.1@388.16,282.42 454.14,315 ; S2.1@393.19,356.22 454.14,315 ; S2.1@576.8,356.22 515.89,315 ; S2.1@581.83,282.42 515.89,315 ; S2.1@581.95,347.34 515.89,315 ; S2.1@585.73,291.92 515.89,315 ; S2.1@585.76,337.97 515.89,315 ; S2.1@588.23,301.72 515.89,315 ; S2.1@588.24,328.24 515.89,315 ; S2.1@589.27,320 515.89,315 ; S2.1@589.37,311.69 515.89,315 ; S2.1@606.09,284.6 C4.2@697.46,267.54 ; S2.1@608.5,294.47 C4.2@697.46,267.54 ; S2.1@611.93,303.94 C4.2@697.46,267.54 ; S2.1@616.35,312.94 C4.2@697.46,267.54 ; S2.1@620.73,320 C4.2@697.46,267.54 ; S2.1@625.72,326.64 C4.2@697.46,267.54 ; S2.1@632.5,334.02 C4.2@697.46,267.54 ; S2.1@640.08,340.66 C4.2@697.46,267.54 ; S2.1@648.4,346.49 C4.2@697.46,267.54 ; C4.2@701.29,229.84 674.62,290.38 ; C4.2@710.18,234.6 674.62,290.38 ; C4.2@717.56,261.19 761.47,276.47 ; C4.2@719.22,222.46 785.36,199.64 ; C4.2@720.08,242.32 674.62,290.38 ; C4.2@721.93,252.01 761.47,276.47 ; C4.2@723.18,231.72 785.36,199.64 ; C4.2@728.34,251.78 674.62,290.38 ; C4.2@733.58,260.39 674.62,290.38 ; C4.2@738.45,251.55 785.36,199.64 ; C4.2@740.21,235.12 761.47,276.47 ; C4.2@746.39,257.75 785.36,199.64 ; C4.2@749.71,231.49 761.47,276.47 ; v2@751.53,365.12 761.47,321.23 v2@771.41,365.12 ; v2(761.47,366.23) 761.47,276.47 ; v2(800,460) 1335,460 1360,485 v2(1450,485) ; v2@801.11,450.06 845,460 v2@801.11,469.94 ; R2.1@803.05,146.49 777.12,207.88 ; R2.1@812.02,151.11 777.12,207.88 ; R2.1@818.74,166.26 745,240 C4.2@725,240 ; R2.1@822.05,158.66 777.12,207.88 ; R2.1@830.48,167.96 777.12,207.88 ; R2.1@835.89,176.47 777.12,207.88 ; U1.48@1219.43,1214.36 1257.21,1214.19 ; U1.48@1219.6,1214.19 1530.81,1214.19 ; v2@1448.89,475.06 1405,485 v2@1448.89,494.94 ; v2@1498.89,1204.26 1455,1214.19 v2@1498.89,1224.13 ; v2@1501.62,1204.33 1530.81,1214.19 ; v2@1501.62,1224.06 1530.81,1214.19 ; P2.17@1739.95,1121 1685.47,1145 ; P2.17@1739.95,1169 1685.47,1145 ; P2.17@1743.23,1130.58 1685.47,1145 ; P2.17@1743.23,1159.42 1685.47,1145 ; P2.17@1745,1145 1600,1145 1530.81,1214.19 ; C4.2@725,240 761.47,276.47 ; 761.47,276.47 729.92,242.32 785.36,199.64
  Bottom Layer w10: v2@755.12,373.96 797.68,402.44 v2@769.2,359.88 ; v2(761.47,366.23) 800,404.76 v2(800,460) ; v2@790.06,458.89 800,415 v2@809.94,458.89 ; v2@1440.06,486.11 1450,530 v2@1459.94,486.11 ; v2(1450,485) 1450,1164.19 v2(1500,1214.19) ; v2@1492.27,1220.54 1463.79,1177.98 v2@1506.35,1206.47
LED: P2.18 R3.1 U1.47 | length 3648.7
  Top Layer w10: v2@895.08,338.75 905,300 ; R3.1@897.82,246.44 917,288 ; v2(905,340) 905,300 ; R3.1@907.47,243.23 917,288 ; v2(910,430) 1150,430 1185,395 v2(1480,395) 1435,395 ; v2@911.11,420.06 955,430 v2@911.11,439.94 ; v2@914.92,338.75 905,300 ; R3.1@917,242.32 917,288 ; R3.1@920,242.32 917,288 ; R3.1@932.3,244.86 917,288 ; R3.1@941.45,249.3 917,288 ; U1.47@1205.68,1200.27 1280.95,1125 1665.25,1125 1695.25,1095 1815,1095 ; U1.47@1220.54,1185.42 1245.64,1160.31 ; v2@1478.89,385.06 1435,395 ; v2@1478.89,404.94 1435,395 ; v2@1498.89,1115.06 1455,1125 v2@1498.89,1134.94 ; v2@1501.11,1115.06 1545,1125 v2@1501.11,1134.94 ; P2.18@1821.78,1152.91 1815,1095 ; P2.18@1831.71,1150.86 1815,1095 ; P2.18@1856.43,1136.03 1815,1095 ; P2.18@1862.91,1128.24 1815,1095 ; 905,300 917,288 ; 1815,1095 P2.18@1845,1145 1845,1125 1815,1095
  Bottom Layer w10: v2@895.06,341.11 905,385 v2@914.94,341.11 ; v2@900,430 905,384.17 ; v2(905,340) 905,425 v2(910,430) 905,384.17 ; v2@919.76,427.84 905,384.17 ; v2@1474.29,403.21 1500,415 ; v2(1480,395) 1500,415 ; v2@1488.21,389.29 1500,415 ; v2@1490.06,1123.89 1500,1080 v2@1509.94,1123.89 ; v2(1500,1125) 1500,415
NetC21_1: C21.1 Ud.1 | length 935.5
  Top Layer w10: Ud.1@637,2219.85 674.48,2191.98 Ud.1@646.61,2229.45 ; Ud.1@641.46,2225 675,2191.46 ; C21.1@685.91,2122.81 675,2191.44 ; C21.1@690,2135 675,2150 ; C21.1@695.72,2125.11 675,2191.44 ; C21.1@717.87,2136.74 675,2191.44 ; C21.1@725,2140 C21.1@727.8,2142.8 ; C21.1@725.33,2143.52 675,2191.44 ; 675,2150 C21.1@707.32,2129.92 ; 675,2150 712.1,2141.54 675,2150 ; 675,2150 699.03,2120.49 675,2150 ; 675,2150 713.01,2151.75 675,2150 ; 675,2150 690.27,2115.15 675,2150 ; 675,2150 C21.1@707.32,2129.92 ; 675,2150 675,2191.46 ; 675,2191.44 C21.1@707.32,2129.92
NetC21_2: C21.2 Ud.3 | length 643.1
  Top Layer w10: C21.2@600.33,2126.8 605,2175 ; C21.2@605,2130 605,2175 ; C21.2@610.49,2126.89 605,2175 ; Ud.3@611.12,2329.89 578.27,2293.27 ; Ud.3@615.87,2325 578.27,2293.27 ; Ud.3@619.89,2319.5 578.27,2293.27 ; C21.2@622.68,2129.92 605,2175 ; C21.2@633.68,2135.98 605,2175 ; C21.2@641.18,2142.82 605,2175 ; Ud.3@641.46,2325 610,2325 575,2290 575,2205 605,2175
NetC22_1: C22.1 Ud.4 | length 560.4
  Top Layer w10: Ud.4@655,2370 684.41,2370 ; Ud.4@666.43,2368.22 684.41,2370 ; Ud.4@667.05,2375 684.41,2370 ; Ud.4@670.13,2381.07 684.41,2370 ; C22.1@835.69,2234.88 836,2284 ; C22.1@845.79,2235.86 836,2284 ; C22.1@857.68,2239.92 836,2284 ; C22.1@860,2250 860,2260 836,2284 ; C22.1@868.15,2246.86 836,2284 ; C22.1@875.09,2254.26 836,2284 ; 684.41,2370 727.8,2326.61 763.04,2326.61 805.65,2284 836,2284
NetC22_2: C22.2 Ud.5 | length 798.8
  Top Layer w10: Ud.5@655,2425 727.8,2352.2 767.8,2352.2 820,2300 885,2300 925,2260 C22.2@940,2260 ; Ud.5@661.56,2420.96 684.57,2395.43 ; Ud.5@667.05,2425 684.57,2395.43 ; Ud.5@673.22,2427.87 684.57,2395.43 ; C22.2@923.6,2227.34 895.31,2289.69 ; C22.2@932.44,2232.17 895.31,2289.69 ; C22.2@942.32,2239.92 895.31,2289.69 ; C22.2@950.62,2249.35 895.31,2289.69 ; C22.2@955.95,2257.9 895.31,2289.69
NetC23_2: C23.2 Ud.2 | length 766.3
  Top Layer w10: Ud.2@649.57,2275.43 774.57,2275.43 800,2250 800,2160 835,2125 C23.2@857.68,2125 C23.2@860,2125 ; Ud.2@667.05,2275 708.86,2275.43 ; Ud.2@667.53,2281.79 708.86,2275.43 ; Ud.2@667.67,2268.22 708.86,2275.43 ; C23.2@844.01,2111.97 801.47,2158.53 ; C23.2@850.89,2119.35 801.47,2158.53 ; C23.2@857.68,2129.92 801.47,2158.53 ; C23.2@862.23,2141.63 801.47,2158.53 ; C23.2@864.15,2151.53 801.47,2158.53
NetC24_2: C24.2 Ud.6 | length 683.7
  Top Layer w10: Ud.6@662.47,2469.96 695.22,2444.78 ; Ud.6@665,2475 705,2435 705,2400.59 727.8,2377.8 767.2,2377.8 795,2350 C24.2@857.68,2350 ; Ud.6@667.05,2475 695.22,2444.78 ; Ud.6@672.39,2479.22 695.22,2444.78 ; C24.2@853.26,2327.88 800.12,2350 ; C24.2@853.26,2372.12 800.12,2350 ; C24.2@856.31,2337.52 800.12,2350 ; C24.2@856.31,2362.48 800.12,2350 ; C24.2@865,2350 C24.2@857.68,2350 ; 800.12,2350 C24.2@857.68,2350
NetD1_1: D1.1 R3.2 | length 804.9
  Top Layer w10: R3.2@911.48,175.8 970.58,205.58 ; R3.2@916.69,167.17 970.58,205.58 ; R3.2@917,157.68 R3.2@919.32,160 ; R3.2@917,160 R3.2@919.32,160 ; R3.2@924.92,157.68 970.58,205.58 ; R3.2@934.79,149.91 970.58,205.58 ; R3.2@936.96,160 R3.2@919.32,160 ; R3.2@943.66,145.12 970.58,205.58 ; D1.1@993.13,254.83 963.68,198.68 ; D1.1@1001.64,249.46 963.68,198.68 ; D1.1@1009.29,242.72 963.68,198.68 ; D1.1@1015.76,234.84 963.68,198.68 ; D1.1@1020,240 1005,240 925,160 R3.2@919.32,160 ; D1.1@1020.83,226.14 963.68,198.68
NetD2_1: D2.1 R5.1 | length 480.9
  Top Layer w30: D2.1@67.28,3054.29 R5.1@68.66,2939.07 ; D2.1@67.39,3045.51 68.66,2927.95 D2.1@68.66,3045.51 ; R5.1@68.66,2925 68.66,3053.66 D2.1@70,3055
NetJA_1: JA.1 JA.1A JA.1B SA.2 | length 659
  Top Layer w50: JA.1A@564.37,3340.79 JA.1@564.37,3390 JA.1B@564.37,3439.21 ; SA.2@740,3485 620,3495 ; SA.2@745,3495 620,3495 ; JA.1B@564.37,3439.21 620,3495 ; JA.1B@564.37,3439.21 620,3495 ; JA.1B@564.37,3439.21 620,3495 ; JA.1B@564.37,3439.21 564.37,3439.37 620,3495
NetR4_1: R4.1 SA.1 | length 677.4
  Top Layer w50: R4.1@885.47,3516.77 790,3400 ; R4.1@935,3520 910,3520 790,3400 ; SA.1@740,3285 790,3335 ; SA.1@740,3285 790,3400 ; SA.1@740,3285 790,3335 ; 790,3335 790,3400
NetR20_1: R20.1 Ud.11 | length 705.5
  Top Layer w10: Ud.11@448.54,2475 510,2475 ; Ud.11@474.13,2475 510,2475 ; Ud.11@474.78,2468.22 510,2475 ; Ud.11@474.78,2481.78 510,2475 ; R20.1@521.3,2699.06 540,2644.35 ; R20.1@531.12,2701.48 540,2644.35 ; R20.1@540,2710 540,2505 510,2475 ; R20.1@543.66,2702.05 540,2644.35 ; R20.1@556.03,2699.9 540,2644.35 ; R20.1@565.46,2696.25 540,2644.35
NetR21_1: R21.1 Ud.12 | length 588.1
  Top Layer w10: R21.1@312.04,2461.59 375.67,2439.33 ; R21.1@316.08,2470.83 375.67,2439.33 ; R21.1@320,2481.34 333.66,2481.34 385,2430 ; R21.1@322.95,2481.34 375.67,2439.33 ; R21.1@331.66,2490.39 375.67,2439.33 ; R21.1@339.77,2496.38 375.67,2439.33 ; Ud.12@421.47,2418.35 385,2430 ; Ud.12@422.95,2425 385,2430 ; Ud.12@423.24,2431.81 385,2430 ; Ud.12@435,2430 385,2430
OSC1: C5.2 P2.12 U1.53 Y2.1 | length 3023.5
  Top Layer w10: U1.53@1163.92,1371.48 1227.44,1435 1675,1435 1715,1395 1795,1395 ; U1.53@1178.78,1386.34 1203.88,1411.44 ; v2@1313.89,1425.06 1270,1435 ; v2@1313.89,1444.94 1270,1435 ; v2(1315,1435) 1270,1435 ; v2@1316.11,1425.06 1360,1435 v2@1316.11,1444.94 ; P2.12@1824.91,1459.07 1795,1395 ; P2.12@1833.73,1454.16 1795,1395 ; P2.12@1845,1445 1795,1395 ; P2.12@1854.16,1433.73 1795,1395 ; P2.12@1859.07,1424.91 1795,1395
  Top Layer w12: Y2.1@1360.13,2171.97 1375,2227 Y2.1@1389.87,2171.97 ; Y2.1@1375,2170 1375,2230 1415,2270 ; C5.2@1396.02,2321.76 1415,2270 ; C5.2@1407.77,2324.65 1415,2270 ; C5.2@1415,2345 1415,2270 ; C5.2@1417.32,2325.08 1415,2270 ; C5.2@1426.8,2323.85 1415,2270 ; C5.2@1438.27,2319.98 1415,2270
  Bottom Layer w12: v2@1309.16,1441.84 1355.46,1475.46 v2@1321.84,1429.16 ; v2(1315,1435) 1375,1495 Y2.1@1375,2170 ; Y2.1@1347.57,2164.4 1375,2100 ; Y2.1@1359.1,2168.17 1375,2100 ; Y2.1@1390.9,2168.17 1375,2100 ; Y2.1@1402.43,2164.4 1375,2100
OSC2: C6.2 P2.13 U1.52 Y2.2 | length 2973.5
  Top Layer w10: U1.52@1177.84,1357.56 1225.27,1405 ; U1.52@1192.7,1372.42 1217.8,1397.52 ; v2@1268.88,1395.06 1225.27,1405 ; v2@1268.88,1414.94 1225.27,1405 ; v2(1270,1405) 1225.27,1405 ; v2@1271.11,1395.06 1315,1405 v2@1271.11,1414.94 ; P2.13@1737.48,1321.65 1705,1345 ; P2.13@1737.48,1368.35 1705,1345 ; P2.13@1742.36,1330.71 1705,1345 ; P2.13@1742.36,1359.29 1705,1345 ; 1225.27,1405 1645,1405 1705,1345 ; 1705,1345 P2.13@1745,1345 1705,1345
  Top Layer w12: C6.2@1091.58,2320.66 1115,2261.42 ; C6.2@1103.18,2324.01 1115,2261.42 ; C6.2@1110,2315 1115,2310 1115,2230 Y2.2@1175,2170 ; C6.2@1112.68,2325.08 1115,2261.42 ; C6.2@1122.23,2324.71 1115,2261.42 ; C6.2@1134.04,2322.21 1115,2261.42 ; Y2.2@1163.25,2160.67 1128.54,2216.46 Y2.2@1184.33,2181.75
  Bottom Layer w12: Y2.2@1158.77,2147.18 1234.46,2110.54 ; Y2.2@1164.81,2157.66 1234.46,2110.54 ; Y2.2@1175,2170 1330,2015 1330,1510 1270,1450 ; Y2.2@1187.34,2180.19 1234.46,2110.54 ; Y2.2@1197.82,2186.23 1234.46,2110.54 ; v2@1261.05,1405.9 1270,1450 ; v2(1270,1405) 1270,1450 ; v2@1278.95,1405.9 1270,1450
P1_0: P1.12 U1.12 | length 984.1
  Top Layer w10: P1.12@183.3,1459.43 250.23,1460 ; P1.12@183.98,1469.51 250.23,1460 ; P1.12@189.77,1431.28 250.23,1460 ; P1.12@194.78,1422.51 250.23,1460 ; 716.12,1411.44 U1.12@741.22,1386.34 ; U1.12@756.08,1371.48 667.56,1460 200,1460 P1.12@185,1445 250.23,1460
P1_1: P1.13 U1.13 | length 935.2
  Top Layer w10: P1.13@63.43,1356.68 90,1380 ; P1.13@71.35,1349.97 90,1380 ; P1.13@85,1345 90,1380 ; P1.13@90,1360 90,1380 ; P1.13@99.5,1345.94 90,1380 ; P1.13@108.98,1350.17 90,1380 ; 702.2,1397.52 U1.13@727.3,1372.42 ; U1.13@742.16,1357.56 669.73,1430 295,1430 260,1395 105,1395 90,1380
P1_2: P1.14 U1.14 | length 863
  Top Layer w10: P1.14@185,1345 255,1345 310,1400 671.89,1400 U1.14@728.24,1343.64 ; P1.14@186.77,1330.58 244.53,1345 ; P1.14@186.77,1359.42 244.53,1345 ; P1.14@190.05,1321 244.53,1345 ; P1.14@190.05,1369 244.53,1345 ; 688.28,1383.6 U1.14@713.38,1358.5
P1_3: P1.15 U1.15 | length 1051.4
  Top Layer w10: P1.15@68.14,1262.82 120,1295 ; P1.15@74.17,1254.69 120,1295 ; P1.15@97.81,1238.14 120,1295 ; P1.15@107.51,1235.26 120,1295 ; 674.36,1369.69 U1.15@699.46,1344.58 ; U1.15@714.32,1329.73 669.05,1375 370,1375 290,1295 120,1295 ; 120,1295 P1.15@85,1245 85,1260 120,1295
P1_4: P1.16 U1.16 | length 820.6
  Top Layer w10: P1.16@185,1245 330,1245 400.81,1315.81 U1.16@700.4,1315.81 ; P1.16@186.77,1230.58 244.53,1245 ; P1.16@186.77,1259.42 244.53,1245 ; P1.16@190.05,1221 244.53,1245 ; P1.16@190.05,1269 244.53,1245 ; 662.79,1315.81 U1.16@700.57,1315.64
P1_5: P1.17 U1.17 | length 985.1
  Top Layer w10: P1.17@67.09,1161.76 115,1195 ; P1.17@73.57,1153.97 115,1195 ; P1.17@98.29,1139.14 115,1195 ; P1.17@108.22,1137.09 115,1195 ; 662.79,1214.19 U1.17@700.57,1214.36 ; U1.17@700.4,1214.19 289.19,1214.19 270,1195 115,1195 ; 115,1195 P1.17@85,1145 85,1165 115,1195
P1_6: P1.18 U1.18 | length 794.9
  Top Layer w10: P1.18@177.86,1168.46 225,1170 ; P1.18@179.29,1158.36 225,1170 ; P1.18@185,1145 225,1170 ; P1.18@194.5,1134.01 225,1170 ; P1.18@200,1145 225,1170 ; P1.18@202.96,1128.3 225,1170 ; U1.18@699.46,1185.42 684.05,1170 ; U1.18@714.32,1200.27 684.05,1170 ; 225,1170 684.05,1170
P1_7: P1.19 U1.19 | length 1031.4
  Top Layer w10: P1.19@66,1060.51 110,1095 ; P1.19@72.96,1053.13 110,1095 ; P1.19@98.73,1040.25 110,1095 ; P1.19@108.81,1039.11 110,1095 ; 688.28,1146.4 U1.19@713.38,1171.5 ; U1.19@728.24,1186.36 636.89,1095 110,1095 ; 110,1095 P1.19@85,1045 85,1070 110,1095
P2_0: P1.20 U1.20 | length 883.6
  Top Layer w10: P1.20@185,1045 614.73,1045 U1.20@742.16,1172.44 ; P1.20@186.77,1030.58 244.53,1045 ; P1.20@186.77,1059.42 244.53,1045 ; P1.20@190.05,1021 244.53,1045 ; P1.20@190.05,1069 244.53,1045 ; 702.2,1132.48 U1.20@727.3,1157.58
P2_1: P1.21 U1.21 | length 1077.9
  Top Layer w10: P1.21@70.93,965.09 135,995 ; P1.21@75.84,956.27 135,995 ; P1.21@85,945 135,995 ; P1.21@96.27,935.84 135,995 ; P1.21@105.09,930.93 135,995 ; 716.12,1118.56 U1.21@741.22,1143.66 ; U1.21@756.08,1158.52 592.56,995 135,995
P2_2: P1.22 U1.22 | length 941.3
  Top Layer w10: P1.22@185,945 570.4,945 U1.22@770,1144.6 ; P1.22@186.77,930.58 244.53,945 ; P1.22@186.77,959.42 244.53,945 ; P1.22@190.05,921 244.53,945 ; P1.22@190.05,969 244.53,945 ; 730.04,1104.64 U1.22@755.14,1129.74
P2_3: P1.23 U1.23 | length 1156
  Top Layer w10: P1.23@67.09,861.76 115,895 ; P1.23@73.57,853.97 115,895 ; P1.23@98.29,839.14 115,895 ; P1.23@108.22,837.09 115,895 ; 743.96,1090.72 U1.23@769.06,1115.82 ; U1.23@783.92,1130.68 548.24,895 115,895 ; 115,895 P1.23@85,845 85,865 115,895
P2_4: P1.24 U1.24 | length 1050.2
  Top Layer w10: P1.24@185,845 245.06,850 ; P1.24@185.55,859.52 245.06,850 ; P1.24@187.94,830.77 245.06,850 ; P1.24@187.98,869.35 245.06,850 ; P1.24@191.97,821.48 245.06,850 ; P1.24@195,850 531.08,850 U1.24@797.84,1116.76 ; 757.88,1076.8 U1.24@782.98,1101.9
P2_5: P1.25 U1.25 | length 1189.7
  Top Layer w10: P1.25@68.21,762.88 115,790 ; P1.25@74.1,754.61 115,790 ; P1.25@98.06,738.64 115,790 ; P1.25@107.96,736.38 115,790 ; 771.8,1062.88 U1.25@796.9,1087.98 ; U1.25@811.76,1102.84 498.92,790 115,790 ; 115,790 P1.25@85,745 85,760 115,790
P2_6: P1.26 U1.26 | length 1056.7
  Top Layer w10: P1.26@185,745 481.76,745 U1.26@825.68,1088.92 ; P1.26@186.77,730.58 244.53,745 ; P1.26@186.77,759.42 244.53,745 ; P1.26@190.05,721 244.53,745 ; P1.26@190.05,769 244.53,745 ; 785.72,1048.96 U1.26@810.82,1074.06
P2_7: P1.27 P?.5 U1.27 | length 3739.4
  Top Layer w10: P1.27@70.93,665.09 135,695 ; P1.27@75.84,656.27 135,695 ; P1.27@85,645 135,695 ; P1.27@90,650 135,695 ; P1.27@96.27,635.84 135,695 ; P1.27@105.09,630.93 135,695 ; 799.64,1035.04 U1.27@824.74,1060.14 ; U1.27@839.6,1075 459.6,695 135,695
  Bottom Layer w10: P?.5@51.34,2434.08 105.5,2389.5 ; P?.5@58.3,2441.39 105.5,2389.5 ; P1.27@71.77,665.65 125.53,685.53 ; P1.27@76.11,656.49 125.53,685.53 ; P?.5@83.22,2456.01 105.5,2389.5 ; P1.27@85,645 125.53,685.53 ; P?.5@93,2458.52 105.5,2389.5 ; P1.27@96.49,636.11 125.53,685.53 ; P1.27@105.65,631.77 125.53,685.53 ; 105.5,2389.5 P?.5@70,2450 70,2425 120,2375 120,1984.61 125.53,1979.08 125.53,685.53
P2_8: P?.3
P3_0: P1.28 P?.4 U1.28 | length 3895.8
  Top Layer w10: P?.4@159.3,2527.93 225.57,2509.43 ; P?.4@162.72,2537.43 225.57,2509.43 ; P?.4@179.76,2560.76 225.57,2509.43 ; P1.28@185,645 437.44,645 U1.28@853.52,1061.08 ; P1.28@186.77,630.58 244.53,645 ; P1.28@186.77,659.42 244.53,645 ; P?.4@187.76,2566.91 225.57,2509.43 ; P1.28@190.05,621 244.53,645 ; P1.28@190.05,669 244.53,645 ; P1.28@203.48,634.75 v7(255,640) ; P1.28@209.51,629.57 v7(255,640) ; P1.28@214.12,645 v7(255,640) ; 216.24,652.06 v7(255,640) ; 217.66,656.84 v7(255,640) ; v3@234.3,2490.13 206.29,2528.71 v3@244.87,2500.7 ; v3(240,2495) 185,2550 P?.4@170,2550 225.57,2509.43 ; 296.06,645 v7(255,640) ; 813.56,1021.12 U1.28@838.66,1046.22 ; 244.53,645 v7(255,640) ; 244.53,645 v7(255,640) ; 244.53,645 v7(255,640) ; 244.53,645 v7(255,640)
  Bottom Layer w10: v3@235.29,2489.16 265,2470 ; v3(240,2495) 265,2470 ; v3@245.84,2499.71 265,2470 ; v7(255,640) 255,675 265,685 265,2470
P3_1: P1.29 P?.6 U1.29 | length 4844
  Top Layer w10: P1.29@68.14,562.82 120,595 ; P1.29@74.17,554.69 120,595 ; P1.29@85,545 120,595 ; P1.29@85,560 120,595 ; P1.29@97.81,538.14 120,595 ; P1.29@107.51,535.26 120,595 ; P?.6@164.59,2426.08 v3(225,2425) ; P?.6@165.62,2436.15 v3(225,2425) ; P?.6@177.56,2462.41 v3(225,2425) ; P?.6@184.47,2469.8 v3(225,2425) ; v3@219.05,2420.43 193.57,2459.75 v3@230.14,2430.46 ; v3@219.16,2420.29 200,2450 ; v3@219.89,2419.51 188.94,2453.43 v3@229.15,2431.25 ; v3@221.32,2418.46 185.19,2443.1 v3@227.51,2432.07 ; v3@222.97,2417.78 183.02,2432.88 v3@225.73,2432.46 ; v3@224.21,2417.54 182.5,2425.76 v3@224.47,2432.48 ; v3@229.71,2430.84 200,2450 ; 827.48,1007.2 U1.29@852.58,1032.3 ; U1.29@867.44,1047.16 415.27,595 120,595 ; P?.6@170,2450 200,2450 ; P?.6@170,2450 v3(225,2425) ; P?.6@170,2450 200,2450 ; 200,2450 173.52,2435.9 200,2450 ; 200,2450 173.52,2464.1 200,2450 ; 200,2450 180.03,2427.62 200,2450 ; 200,2450 180.03,2472.38 200,2450 ; 200,2450 v3(225,2425)
  Bottom Layer w10: P1.29@70.93,565.09 135,595 ; P1.29@75.84,556.27 135,595 ; P1.29@85,545 135,595 ; P1.29@96.27,535.84 135,595 ; P1.29@105.09,530.93 135,595 ; P?.6@170,2450 P?.6@195,2450 ; v3@220.32,2419.14 249,2401 ; v3(225,2425) 249,2401 ; v3@230.86,2429.68 249,2401 ; 135,595 192.84,595 234,636.16 234,676.63 249,691.63 249,2401
P3_2: P1.30 P?.8 U1.30 | length 3853.7
  Top Layer w10: P1.30@185,545 393.11,545 U1.30@881.36,1033.24 ; P1.30@186.77,530.58 244.53,545 ; P1.30@186.77,559.42 244.53,545 ; P1.30@190.05,521 244.53,545 ; P1.30@190.05,569 244.53,545 ; 841.4,993.28 U1.30@866.5,1018.38
  Bottom Layer w10: P?.8@155.88,2329.95 220.74,2299.26 ; P?.8@160.82,2338.74 220.74,2299.26 ; P?.8@170,2350 233,2287 233,728 200,695 160,695 140,675 140,640 95,595 55,595 35,575 35,520 60,495 100,495 140,535 ; P1.30@173.5,566.67 140,535 ; P1.30@179.65,558.51 140,535 ; P?.8@181.26,2359.18 220.74,2299.26 ; P1.30@183.76,520.5 140,535 ; P1.30@185,540 180,535 140,535 ; P1.30@185,545 140,535 ; P1.30@185.88,530.5 140,535 ; P?.8@190.05,2364.12 220.74,2299.26
P3_3: P1.31 P?.2 U1.31 | length 4436.5
  Top Layer w10: P1.31@68.14,462.82 120,495 ; P1.31@74.17,454.69 120,495 ; P1.31@85,445 120,495 ; P1.31@97.81,438.14 120,495 ; P1.31@100,470 95,470 120,495 ; P1.31@107.51,435.26 120,495 ; P?.2@155.88,2629.95 220.74,2599.26 ; P?.2@160.82,2638.74 220.74,2599.26 ; P?.2@170,2650 v3(270,2550) 236.29,2583.71 ; P?.2@181.26,2659.18 220.74,2599.26 ; P?.2@190.05,2664.12 220.74,2599.26 ; v3@264.3,2545.13 236.29,2583.71 ; v2@273.89,485.06 230,495 v2@273.89,504.94 ; v3@274.87,2555.7 236.29,2583.71 ; v2@276.11,485.06 320,495 v2@276.11,504.94 ; 855.31,979.36 U1.31@880.42,1004.46 ; U1.31@895.27,1019.32 370.95,495 v2(275,495) 120,495
  Bottom Layer w10: v3@262.79,2547.94 281,2497.97 ; v2@265.06,496.11 275,540 v2@284.94,496.11 ; v2(275,495) 275,624.3 281,630.3 281,2539 v3(270,2550) 281,2497.97 ; v3@277.43,2551.03 281,2497.97